# Altium PCB PCB1.PcbDoc
Units mm, origin at the board's own origin, x right, y up, seen from the top; angles counter-clockwise.
Board outline 152.4 x 101.6 mm, 4 copper layers (Top Layer, Int1 (GND), Int2 (PWR), Bottom Layer), stack 1.57 mm thick; 35 components, 28 nets, 158 pads, 29 vias.
Unrouted connection lines stored in the file: 38.
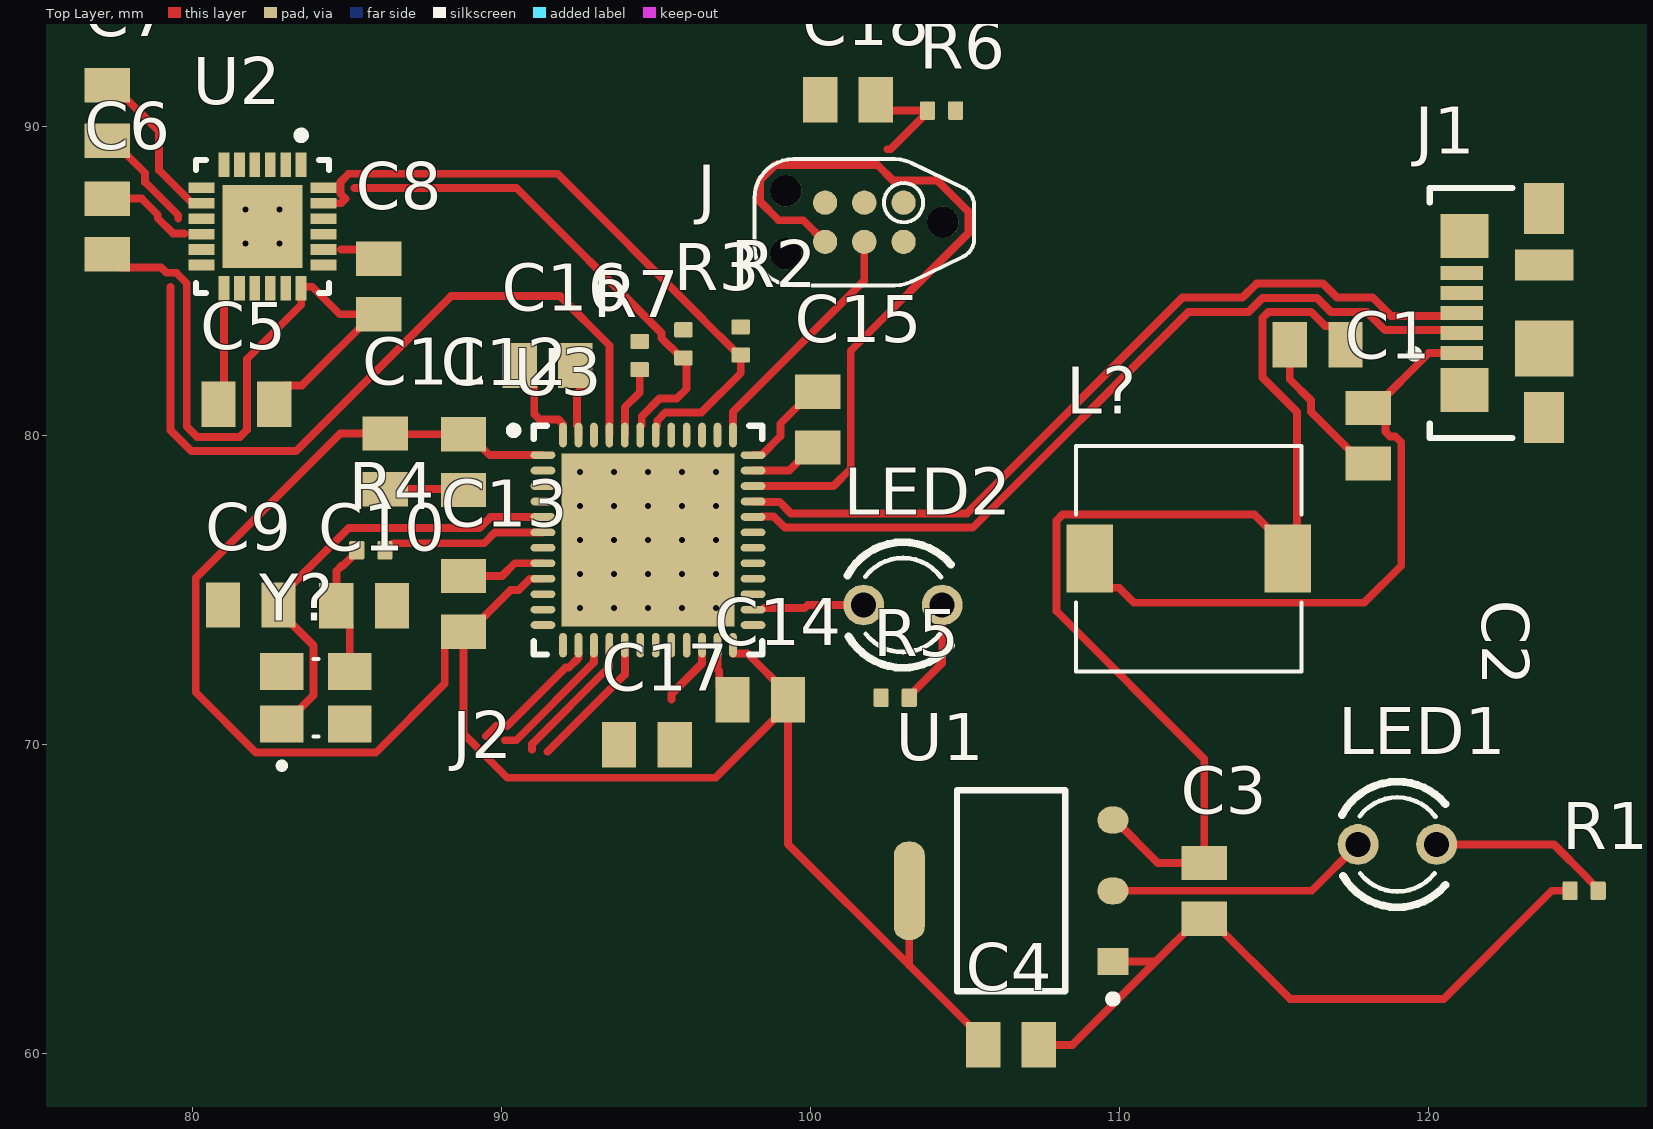
[diagram p0: Top Layer view]
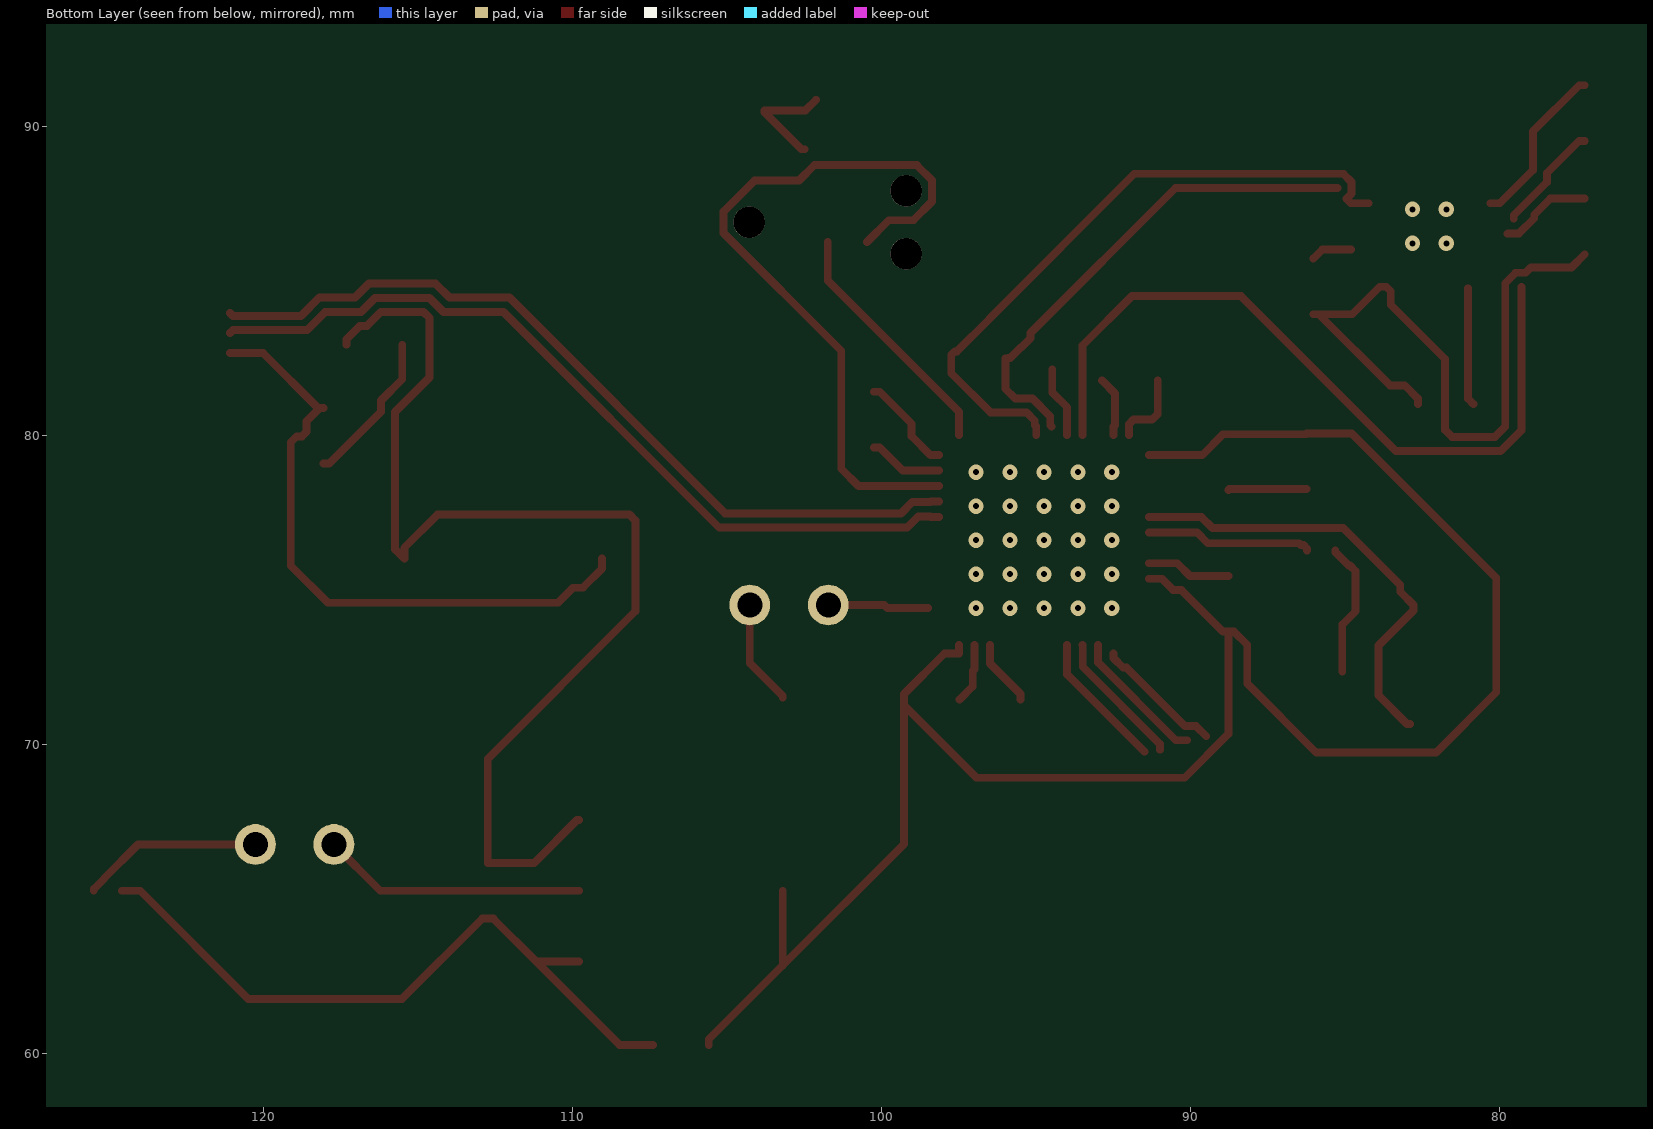
[diagram p1: Bottom Layer view, seen from below]
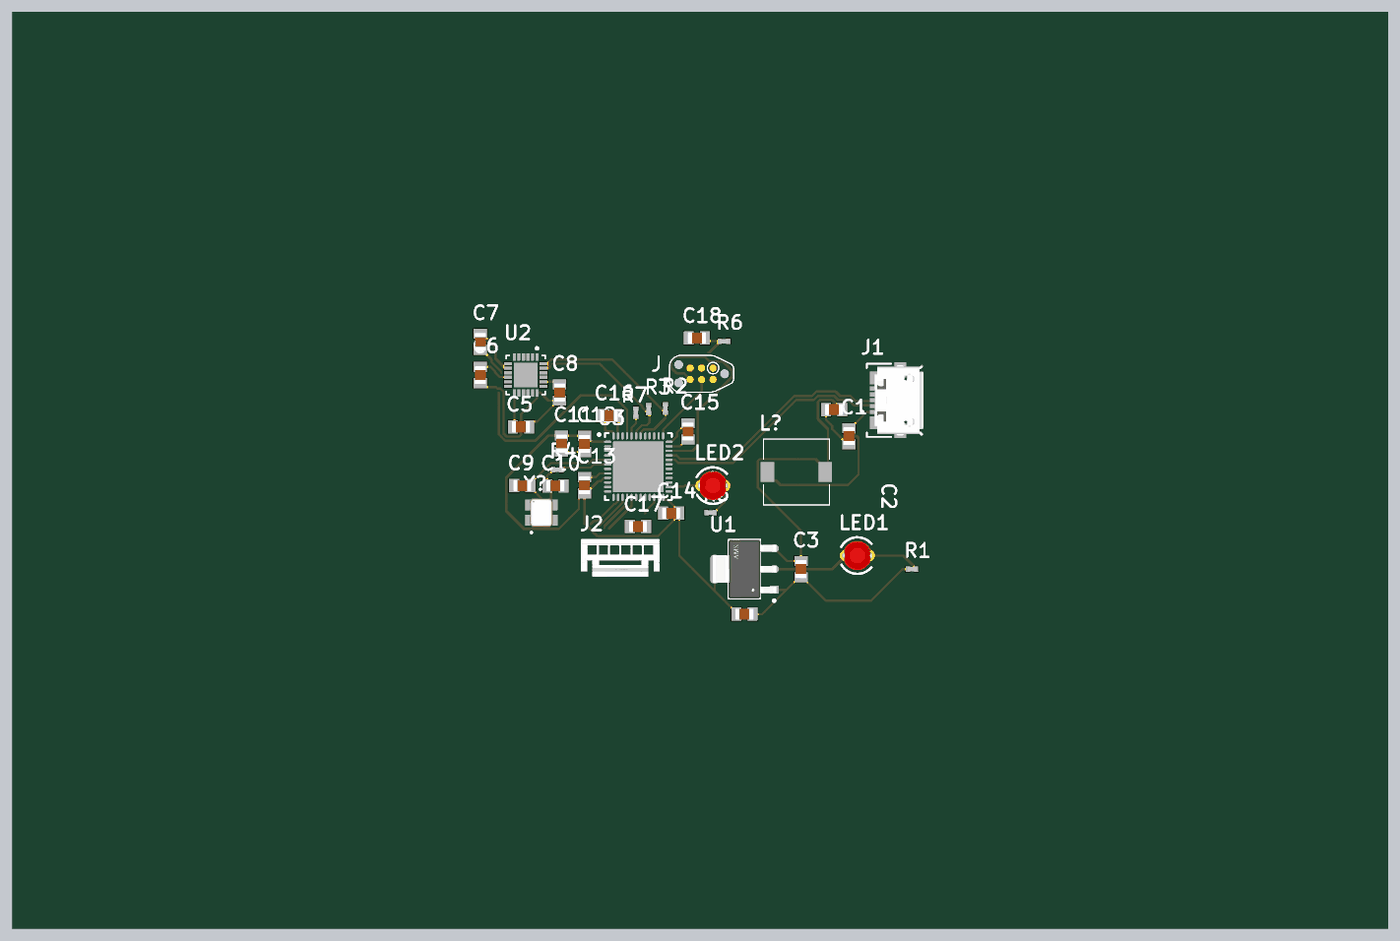
[diagram p2: 3D render of the assembled board from above, using the file's embedded part models]

## Layer stack, top to bottom
Top Solder: solder mask 0.0254, SM-001, Dk 4
Top Layer: signal copper 0.035
Dielectric 1: prepreg 0.2, PP-017, Dk 4.6
Int1 (GND): signal copper 0.0175
Dielectric 3: core 1.065, Core-039, Dk 4.6
Int2 (PWR): signal copper 0.0175
Dielectric 5: prepreg 0.2, PP-017, Dk 4.6
Bottom Layer: signal copper 0.035
Bottom Solder: solder mask 0.0254, SM-001, Dk 4

## Board outline
25.4,25.4 177.8,25.4 177.8,127 25.4,127

## Design rules (kind name [scope] priority, off if disabled: settings)
Clearance [All] p1: gap=0.2 ignorepadtopadclearanceinfootprint=FALSE
DiffPairsRouting [All] p1: maxlimit=0.254 minlimit=0.203 mostfreqgap=0.254 toplayer_maxgap=0.203 toplayer_prefgap=0.203 toplayer_minwidth=0.26 toplayer_maxwidth=0.26 toplayer_prefwidth=0.26 bottomlayer_maxgap=0.203 bottomlayer_prefgap=0.203 bottomlayer_minwidth=0.26 bottomlayer_maxwidth=0.26 bottomlayer_prefwidth=0.26 impedanceprofiledriven=TRUE impedanceprofileid={6F8DBCE6-1E18-4CB0-B7E9-831015EEBB44} impedanceprofilevalue=90.000000 maxuncoupledlength=12.7
PolygonConnect [All] p1: connectstyle=Direct reliefconductorwidth=0.254 reliefentries=4 polygonreliefangle="90 Angle" airgapwidth=0.254
RoutingVias [All] p1: holewidth=0.711 width=1.27 viastyle="Through Hole" minholewidth=0.711 minwidth=1.27 maxholewidth=0.711 maxwidth=1.27
SolderMaskExpansion [All] p1: expansion=0 istentingtop=FALSE
SupplyNets "Schematic Supply Nets_3" [InNet('VBUS')] p1: voltage=0.000
SupplyNets "Schematic Supply Nets_2" [InNet('+3V3')] p2: voltage=0.000
SupplyNets "Schematic Supply Nets_1" [InNet('GND')] p3: voltage=0.000
SupplyNets "Schematic Supply Nets" [InNet('+5')] p4: voltage=0.000
UnRoutedNet [All] p1: checkbadconnections=TRUE
Width [All] p1: maxlimit=1 minlimit=0.2 preferedwidth=0.254 midlayer1_minwidth=0.254 midlayer1_maxwidth=0.254 midlayer2_minwidth=0.254 midlayer2_maxwidth=0.254 minimp=50.000000 maximp=50.000000 favimp=50.000000
28 further rules are at their usual default settings.

## Classes and differential pairs
differential pair class *DIFF_USB: USB_D
differential pair USB_D: +USB_D_P -USB_D_N

## Components (designator, comment, footprint, x,y, rotation, side; value= is the part's Value field where it differs from the comment)
C1 "2u2" CAPC2012X145N 118.063,79.976 r90 top
C2 "2u2" CAPC2012X145N 116.42,82.921 r0 top
C3 "22u" CAPC2012X145N 112.75,65.25 r90 top
C4 "22u" CAPC2012X145N 106.5,60.263 r180 top
C5 "100n" CAPC2012X145N 81.75,81 r180 top
C6 "100n" CAPC2012X145N 77.25,86.75 r90 top
C7 "10n" CAPC2012X145N 77.25,90.42 r90 top
C8 "2u2" CAPC2012X145N 86.037,84.81 r90 top
C9 "10p" CAPC2012X145N 81.894,74.501 r0 top
C10 "10p" CAPC2012X145N 85.564,74.48 r180 top
C11 "2u2" CAPC2012X145N 86.25,79.15 r90 top
C12 "100n" CAPC2012X145N 88.778,79.124 r90 top
C13 "100n" CAPC2012X145N 88.778,74.539 r270 top
C14 "100n" CAPC2012X145N 98.383,71.438 r0 top
C15 "100n" CAPC2012X145N 100.25,80.5 r90 top
C16 "100n" CAPC2012X145N 91.5,82.25 r180 top
C17 "2u2" CAPC2012X145N 94.713,69.97 r0 top
C18 "100n" CAPC2012X145N 101.224,90.85 r0 top
J "TC2030-CTX" TC2030-IDC-NL 101.75,86.885 r180 top
J1 "473460001" FP-473460001-MFG 123.4,83.95 r90 top
J2 "GHR-06V-S" FP-GHR-06V-S-MFG 92.75,66.5 r180 top
L? "B82472P6472M000" IND_B82472P6472M000 112.25,76 r0 top
LED1 "TLLR4400" LED3MM 119,66.75 r0 top
LED2 "TLLR4400" LED3MM 103,74.5 r0 top
R1 "1K" RESC1005X35N 125.045,65.25 r0 top
R2 "2K2" RESC1005X35N 97.75,83.045 r90 top
R3 "2K2" RESC1005X35N 95.896,82.951 r90 top
R4 "0R" RESC1005X35N 85.779,76.267 r0 top
R5 "1K" RESC1005X35N 102.75,71.5 r180 top
R6 "10K" RESC1005X35N 104.25,90.5 r0 top
R7 "10K" RESC1005X35N 94.481,82.575 r270 top
U1 "AMS1117-3.3" FP-AMS1117-IPC_C 106.5,65.25 r180 top
U2 "MPU-6050" IS-QFN-24_V 82.275,86.75 r270 top
U3 "STM32F411CEU6" STM-UFQFPN48_L 94.75,76.6 r0 top
Y? "C3E-8.000-8-1015-R" XTAL_C3E-8.000-8-1015-R 84,71.5 r90 top

## Footprints (in the part's own frame and the unit in brackets; to place one, negate y for a bottom-side part, rotate by r counter-clockwise, add the part's x,y. Pads: shape width x height; smd on the part's side, far side on the other; paste and mask are expansions set on the pad)
CAPC2012X145N [mm]
  rect 1.11x1.47 smd paste+0 mask+0.102: 1(-0.9,0) 2(0.9,0)
  body extent -1,-0.63 1,0.63, height 1.45
FP-473460001-MFG [mm]
  rect 0.45x1.38 smd paste+0 mask+0: 1(-1.3,2.31) 2(-0.65,2.31) 3(0,2.31) 4(0.65,2.31) 5(1.3,2.31)
  rect 1.425x1.55 smd paste+0 mask+0: 6(-2.488,2.225) 7(2.488,2.225)
  rect 1.65x1.3 smd paste+0 mask+0: 8(-3.375,-0.35) 11(3.375,-0.35)
  rect 1.8x1.9 smd paste+0 mask+0: 9(-1.15,-0.35)
  rect 1x1.9 smd paste+0 mask+0: 10(1.55,-0.35)
  silkscreen extent -4.05,0.67 4.05,3.97, body extent -4.3,-2.48 4.3,3.45, height 0.25
FP-AMS1117-IPC_C [mm]
  rect 1.004x0.872 smd paste+0 mask+0: 1(-3.295,2.29)
  rrect100% 1.004x0.872 smd paste+0 mask+0: 2(-3.295,0) 3(-3.295,-2.29)
  rrect87% 1.004x3.182 smd paste+0 mask+0: 4(3.295,0)
  silkscreen extent -3.42,-3.25 1.75,3.62, body extent -3.9,-3.35 3.9,3.35, height 0.25
FP-GHR-06V-S-MFG [mm]
  body extent -4.47,-2.17 4.47,2.17, height 0.25
IND_B82472P6472M000 [mm]
  rect 1.5x2.2 smd: 1(-3.2,0) 2(3.2,0)
  silkscreen extent -3.65,-3.65 3.65,3.65
IS-QFN-24_V [mm] "QFN, 24-Leads, Body 4x4mm, Pitch 0.5mm, Thermal Pad 2.7x2.6mm"
  rect 0.8x0.35 smd: 1(-2,1.25) 2(-2,0.75) 3(-2,0.25) 4(-2,-0.25) 5(-2,-0.75) 6(-2,-1.25) 13(2,-1.25) 14(2,-0.75) 15(2,-0.25) 16(2,0.25) 17(2,0.75) 18(2,1.25)
  rect 0.35x0.85 smd mask+0.102: 7(-1.25,-1.975) 8(-0.75,-1.975) 9(-0.25,-1.975) 10(0.25,-1.975) 11(0.75,-1.975) 12(1.25,-1.975) 19(1.25,1.975) 20(0.75,1.975) 21(0.25,1.975) 22(-0.25,1.975) 23(-0.75,1.975) 24(-1.25,1.975)
  rect 2.7x2.6 smd: 25(0,0)
  silkscreen extent -3.07,-2.15 2.15,2.15, body extent -2,-2 2,2, height 0.95
LED3MM [mil]
  round 52 hole 32: A(-50,0) K(50,0)
  silkscreen extent -71,-80 61,80, body extent -60,-62 60,62, height 240
RESC1005X35N [mm]
  rrect20% 0.49x0.6 smd paste+0 mask+0.102: 1(-0.455,0) 2(0.455,0)
  body extent -0.5,-0.25 0.5,0.25, height 0.16
STM-UFQFPN48_L [mm] "QFN, 48-Leads, Body 7.1x7.1mm, Pitch 0.5mm, Thermal Pad 5.6x5.6mm, IPC High Density"
  oval 0.8x0.25 smd: 1(-3.4,2.75) 2(-3.4,2.25) 3(-3.4,1.75) 4(-3.4,1.25) 5(-3.4,0.75) 6(-3.4,0.25) 7(-3.4,-0.25) 8(-3.4,-0.75) 9(-3.4,-1.25) 10(-3.4,-1.75) 11(-3.4,-2.25) 12(-3.4,-2.75) 25(3.4,-2.75) 26(3.4,-2.25) 27(3.4,-1.75) 28(3.4,-1.25) 29(3.4,-0.75) 30(3.4,-0.25) 31(3.4,0.25) 32(3.4,0.75) 33(3.4,1.25) 34(3.4,1.75) 35(3.4,2.25) 36(3.4,2.75)
  oval 0.25x0.8 smd: 13(-2.75,-3.4) 14(-2.25,-3.4) 15(-1.75,-3.4) 16(-1.25,-3.4) 17(-0.75,-3.4) 18(-0.25,-3.4) 19(0.25,-3.4) 20(0.75,-3.4) 21(1.25,-3.4) 22(1.75,-3.4) 23(2.25,-3.4) 24(2.75,-3.4) 37(2.75,3.4) 38(2.25,3.4) 39(1.75,3.4) 40(1.25,3.4) 41(0.75,3.4) 42(0.25,3.4) 43(-0.25,3.4) 44(-0.75,3.4) 45(-1.25,3.4) 46(-1.75,3.4) 47(-2.25,3.4) 48(-2.75,3.4)
  rect 5.6x5.6 smd: 49(0,0)
  silkscreen extent -4.47,-3.7 3.7,3.7, body extent -3.55,-3.55 3.55,3.55, height 0.6
TC2030-IDC-NL [mil]
  round 31 smd paste-39.37: 1(-50,-25) 2(-50,25) 3(0,-25) 4(0,25) 5(50,-25) 6(50,25)
  round 40 hole 40 unplated: ""(-100,0) ""(100,-40) ""(100,40)
  silkscreen extent -140,-81 140,81
XTAL_C3E-8.000-8-1015-R [mm]
  rect 1.2x1.4 smd: 1(-0.85,1.1) 2(-0.85,-1.1) 3(0.85,-1.1) 4(0.85,1.1)
  silkscreen extent -2.3,-0.08 1.25,1.2, body extent -1.25,-1.6 1.25,1.6, height 0.75

## Part data
C1 C2 C3 C4 C5 C6 C7 C8 C9 C10 C11 C12 C13 C14 C15 C16 C17 C18: library part GRM21BC81E106KE11L, "10 ÂµF Â±10% 25V Ceramic Capacitor X6S 0805 (2012 Metric)", Package="2012 Murata", Check_prices=https://www.snapeda.com/parts/GRM21BC81E106KE11L/Murata/view-part/?ref=eda, MF=Murata, MP=GRM21BC81E106KE11L, SnapEDA_Link=https://www.snapeda.com/parts/GRM21BC81E106KE11L/Murata/view-part/?ref=snap
J: "CortexÂ® Plug-Of-Nailsâ„¢ Adapter Cable", Package=None, Availability=Unavailable, MF="Tag-Connect LLC", MP=TC2030-CTX, Price=None, SnapEDA_Link=https://www.snapeda.com/parts/TC2030-CTX/Tag-Connect%20LLC/view-part/225831/?ref=snap
J1: library part CMP-2000-05246-2, "CONN RCPT USB2.0 MICRO B SMD R/A", Current Rating=1.8A, Manufacturer=Molex, Package=0, Temperature="-30°C to +85°C", Temperature Range High=+85°C, Temperature Range Low=-30°C, Voltage Rating=30V, Automotive=No, Category=Conn, ComponentLink2Description=Datasheet, ComponentLink2URL=https://www.molex.com/webdocs/datasheets/pdf/en-us/0473460001_IO_CONNECTORS.pdf, Conn Orientation="Right Angle", Contact Material=Gold,Nickel, Device Class L1=Connectors, Device Class L2="USB Connectors", Device Class L3=unset, Digikey Description="CONN RCPT USB2.0 MICRO B SMD R/A", Footprint Url=https://www.molex.com/pdm_docs/sd/473460001_sd.pdf, Height=2.945mm, Is Female=yes, Lead Free=Yes, Manufacturer Part Number=473460001, Number Of Contacts=5, Octopart=https://octopart.com/47346-0001-molex-7164928, Pitch=0.65mm, RoHS=TRUE, Shielding=true, Usb Standard="USB 2.0"
J2: library part CMP-17439-000079-1, "CONN GH HOUSING 6POS 1.25MM", Color=Natural, Current Rating=1A, Max Operating Temperature=85°C, Min Operating Temperature=-25°C, Voltage Rating (AC)=50V, Connector Type=Receptacle, Contact Material=Bronze, Contact Plating=Tin, Contact Type="Female Socket", Depth=5.7mm, Fastening Type=Latch, Housing Color=Natural, Housing Material=PBT, Lead Free="Lead Free", Length=8.75mm, Mount="Free Hanging", Number Of Contacts=6, Number of Positions=6, Number of Rows=1, Packaging=Bulk, Pitch=0.049inch, REACH SVHC="No SVHC", Series=GH, Termination=Crimp, Width=4.15mm, Wire/Cable Gauge=26AWG
L? Y?: Package=None, Price=None
  L?: Availability="In Stock", Check_prices=https://www.snapeda.com/parts/B82472P6472M000/TDK/view-part/?ref=eda, MF=TDK, MP=B82472P6472M000, Purchase-URL=https://pricing.snapeda.com/search/part/B82472P6472M000/?ref=eda, SnapEDA_Link=https://www.snapeda.com/parts/B82472P6472M000/TDK/view-part/?ref=snap
  Y?: Availability=Unavailable, MP=C3E-8.000-8-1015-R
LED1 LED2: "Red 619nm LED Indication - Discrete 1.9V Radial", Package=None, Check_prices=https://www.snapeda.com/parts/TLLR4400/Vishay+Semiconductor+Opto+Division/view-part/?ref=eda, MF=Vishay, MP=TLLR4400, SnapEDA_Link=https://www.snapeda.com/parts/TLLR4400/Vishay+Semiconductor+Opto+Division/view-part/?ref=snap
R1 R2 R3 R4 R5 R6 R7: library part 1-2176049-2, "Fixed Resistor, Thick Film, 0.12", Package=0402, Power_Rating=".125 W", Resistance=.15, Tolerance=1%, Check_prices=https://www.snapeda.com/parts/1-2176049-2/TE+Connectivity/view-part/?ref=eda, EU_RoHS_Compliance="Compliant with Exemptions", MF="TE Connectivity", MP=1-2176049-2, SnapEDA_Link=https://www.snapeda.com/parts/1-2176049-2/TE+Connectivity/view-part/?ref=snap
U1: library part CMP-209535-000001-1, "LDO Voltage Regulators 1A, 3.3V", Dropout Voltage=1.1V, Manufacturer="Advanced Monolithic Systems", Max Junction Temp=+125°C, Max Power Dissipation=1.2W, Max Supply Voltage=15V, Nominal Supply Current=5mA, Output Current=1A, Output Voltage=3.3V, Package=AMS1117, Temperature="-40°C to +125°C", Temperature Range Low=-40°C, Automotive=No, Category=IC, ComponentLink2Description=Datasheet, ComponentLink2URL=http://www.advanced-monolithic.com/pdf/ds1117.pdf, Device Class L1="Integrated Circuits (ICs)", Device Class L2="Power Management ICs", Device Class L3="Voltage Regulators - Linear", Height=1.8mm, Ipc Land Pattern Name=SOT229P700X180-4, Lead Free=Yes, Manufacturer Part Number=AMS1117-3.3, Number Of Outputs=1, Octopart=https://octopart.com/ams1117-3.3-advanced+monolithic+systems-25899300, Output Type=Fixed, RoHS=TRUE, Standoff Height=0.64mm, Temperature Range High=+125°C
U2: library part CMP-1753-00002-2, "3-Axis Gyroscope, Accelerometer and a Digital Motion Processor(TM) (DMP), 2.375 to 3.46 V, -40 to 85 degC, 24-Pin QFN, RoHS, Tape and Reel", Manufacturer=InvenSense, Standard Package=5,000, Category=Sensors,Transducers, Datasheet URL=http://datasheet.octopart.com/MPU-6050-InvenSense-datasheet-14421344.pdf, Datasheet Version="Rev. 3.3, 05/2012", Dynamic Catalog=MPU-6000™Series, Family=Multifunction, Featured Product=MPU-60506-Axis,IntegratedI²CSolution, Manufacturer URL=http://www.invensense.com/, Online Catalog=MPU-6000™Series, Other Names="1428-1007-2 / MPU6050", Output Type=Digital, Sensor Type=MotionTracking, Unit PriceUSD=Digital
U3: library part CMP-0243-00165-1, "ARM Cortex-M4 32-bit MCU+FPU, 512 KB Flash, 128 KB RAM, 36 I/Os, 48-Pin UFQFPN, -40 to 85 degC, Tray", I/Os (High Current)=36, Operating Frequency(F) (Processor speed) (MHz)=100, Package Description=UFQFPN48, Package Reference="48-Pin Ultra Thin Fine Pitch Quad Flat No-Lead, 7 x 7 x 0.6 mm Body, 0.5 mm Pitch, Exposed Pad", Supply Voltage(Vcc) min (V)=1.7, ComponentLink1Description="Manufacturer URL", ComponentLink1URL=http://www.st.com/, ComponentLink2Description=Datasheet, ComponentLink2URL=http://www.st.com/st-web-ui/static/active/en/resource/technical/document/datasheet/DM00115249.pdf, Core="ARM Cortex-M4", DatasheetVersion="Rev. 6", FLASH Size (Prog) (kB)=512, Internal RAM Size (kB)=128, Mounting Technology="Surface Mount", Packing=Tray

## Via types
v1: diameter 0.5, hole 0.2, Top Layer to Bottom Layer, 29 vias

## Nets (pads, with @x,y where several pads share a name; then routed paths per layer and width w, separated by ;. In a path a pad name is that pad's centre, name@x,y a point inside that pad or via, vN(x,y) a via of type N, cw(c..) or ccw(c..) an arc to the next point about the centre after c; other vN are vias at no path point)
+3V3: C4.2 C5.2 C7.2 C11.2 C12.2 C13.2 C14.2 C15.2 C16.2 J.1 J.5 LED1.A R2.2 R3.2 R6.2 U1.2 U1.4 U2.1 U2.8 U2.9 U2.11 U2.13 U3.1 U3.9 U3.24 U3.36 U3.48 | length 90.1
  Top Layer w0.254: C7.2 77.43,91.32 78.929,89.821 78.929,88.571 80,87.5 U2.8 ; C5.2 81.025,81.175 U2.13 ; C16.2@91.069,81.762 91.069,80.681 91.25,80.5 91.851,80.5 92,80.351 U3.48 ; U3.9 91.348,75.348 90.934,75.348 90.571,74.985 90.304,74.985 88.958,73.639 C13.2 ; U3.1 89.632,79.35 88.958,80.024 C12.2 86.276,80.024 C11.2 84.791,80.05 80.112,75.371 80.112,71.675 82.065,69.723 85.935,69.723 88.17,71.958 88.17,73.211 88.598,73.639 C13.2 ; U3.24 97.5,72.929 97.502,72.927 97.974,72.927 99.283,71.618 C14.2 C14.2@99.283,71.258 ; U3.36 98.421,79.35 99.033,79.961 99.033,80.363 100.07,81.4 C15.2 ; U1.4 103.205,62.838 ; C4.2 105.6,60.443 103.205,62.838 ; U1.2 116.23,65.25 LED1.A ; C13.2 88.778,70.33 90.199,68.908 96.934,68.908 C14.2@99.283,71.258 ; C14.2@99.283,71.258 99.283,66.76 103.205,62.838
+5: C2.2 C3.2 L?.2 U1.3 | length 36.6
  Top Layer w0.254: U1.3 109.861,67.54 111.251,66.15 C3.2 112.75,69.518 107.973,74.295 107.973,77.235 108.165,77.427 114.373,77.427 115.45,76.35 L?.2 115.75,76.3 115.75,80.747 114.638,81.86 114.638,83.792 114.829,83.983 116.21,83.983 116.664,83.529 116.892,83.529 117.32,83.101 C2.2
GND: C1.1 C2.1 C3.1 C4.1 C5.1 C6.1 C7.1 C8.1 C9.1 C10.1 C11.1 C12.1 C13.1 C14.1 C15.1 C16.1 C17.1 C18.1 J1.5 R1.1 R5.2 R7.1 U1.1 U2.18 U2.25 U3.8 U3.23 U3.35 U3.47 U3.49 Y?.2 Y?.4 | length 65.6
  Top Layer w0.254: C6.1 77.678,85.422 78.994,85.422 79.166,85.25 79.488,85.25 79.824,84.914 79.824,80.274 80.16,79.938 81.54,79.938 81.768,80.166 81.768,82.456 83.527,84.215 83.527,84.653 83.676,84.801 83.886,84.801 84.778,83.91 C8.1 85.857,83.91 83.555,81.608 83.078,81.608 82.65,81.18 C5.1 ; C7.1 77.43,89.52 78.475,88.475 78.475,88.183 79.548,87.11 79.548,87 ; C11.1 88.752,78.25 C12.1 ; C13.1 90.027,75.439 90.438,75.85 U3.8 ; U3.47 92.5,80.271 92.454,80.317 92.454,81.347 C16.1@92.869,81.762 ; U3.23 97.002,73.198 97.002,72.419 97.055,72.366 97.055,71.866 C14.1 ; U3.35 99.32,78.85 100.07,79.6 C15.1 ; C4.1 108.483,60.263 111.18,62.96 ; U1.1 111.18,62.96 ; C2.1 115.52,81.805 116.204,81.121 116.204,80.755 117.883,79.076 C1.1 ; R1.1 124,65.25 120.5,61.75 115.53,61.75 112.93,64.35 C3.1 112.57,64.35 111.18,62.96
  other v1: 92.55,74.4 93.65,74.4 94.75,74.4 95.85,74.4 96.95,74.4 92.55,75.5 93.65,75.5 94.75,75.5 95.85,75.5 96.95,75.5 92.55,76.6 93.65,76.6 94.75,76.6 95.85,76.6 96.95,76.6 92.55,77.7 93.65,77.7 94.75,77.7 95.85,77.7 96.95,77.7 92.55,78.8 93.65,78.8 94.75,78.8 95.85,78.8 96.95,78.8 81.725,86.2 82.825,86.2 81.725,87.3 82.825,87.3
IMU_CPOUT: C8.2 U2.20 | length 1.3
  Top Layer w0.254: 84.812,86 85.747,86 C8.2
IMU_INT: U2.12 U3.45 | length 24.8
  Top Layer w0.254: 79.3,84.796 79.3,80.156 79.972,79.484 83.364,79.484 88.38,84.5 91.902,84.5 93.5,82.902 U3.45
IMU_REGOUT: C6.2 U2.10 | length 3
  Top Layer w0.254: C6.2 78.366,87.65 78.886,87.13 78.886,87.02 79.379,86.527 79.736,86.527 79.75,86.513
IMU_SCL: R2.1 U2.23 U3.42 | length 21.2
  Top Layer w0.254: U2.23 84.812,87.5 84.96,87.648 84.796,87.812 84.796,88.188 85.062,88.454 91.827,88.454 96.523,83.758 96.523,83.748 97.563,82.708 97.632,82.708 R2.1 ; U3.42 95,80.271 95.048,80.319 95.048,80.462 95.313,80.727 96.477,80.727 97.75,82 R2.1@97.75,82.545
IMU_SDA: R3.1 U2.24 U3.43 | length 16.2
  Top Layer w0.254: 85.25,88 90.49,88 95.188,83.301 95.188,83.135 95.489,82.834 95.503,82.834 95.841,82.496 R3.1 ; U3.43@94.502,80.273 94.546,80.317 94.546,80.602 95.125,81.181 95.681,81.181 96,81.5 R3.1@96,82.486
LED_PWR_K: LED1.K R1.2 | length 5.9
  Top Layer w0.254: LED1.K 124.069,66.75 125.162,65.657 125.162,65.643 125.5,65.305 R1.2
MCU_BOOT0: R7.2 U3.44 | length 2.3
  Top Layer w0.254: U3.44 94,80.896 94.481,81.377 R7.2
MCU_OSC_IN: C9.2 U3.5 Y?.1 | length 14.7
  Top Layer w0.254: Y?.1 83,70.65 83.927,71.577 83.927,73.188 82.794,74.321 C9.2 83.222,74.929 83.222,75.145 85.067,76.989 89.295,76.989 89.656,77.35 U3.5
MCU_OSC_OUT: R4.2 U3.6 | length 5.4
  Top Layer w0.254: R4.2 86.234,76.322 86.352,76.44 86.441,76.44 86.501,76.5 89.448,76.5 89.798,76.85 U3.6
MCU_PA4: U3.14 | length 4.2
  Top Layer w0.254: 89.5,70.25 89.829,70.579 90.187,70.579 92.081,72.473 92.187,72.473 92.498,72.784 U3.14@92.498,72.927
MCU_PA5: U3.15 | length 4.5
  Top Layer w0.254: 90.125,70.125 90.481,70.125 92.998,72.642 92.998,73.198 U3.15
MCU_PA6: U3.16 | length 4.4
  Top Layer w0.254: 91,69.814 91,70.002 93.498,72.5 93.498,73.198 U3.16
MCU_PA7: U3.17 | length 4.5
  Top Layer w0.254: 91.5,69.75 94,72.25 U3.17
MCU_RST: J.3
MCU_SWCLK: J.4 U3.37 | length 8
  Top Layer w0.254: U3.37 97.5,80.75 101.75,85 J.4
MCU_SWDIO: J.6 U3.34 | length 24.2
  Top Layer w0.254: U3.34 100.752,78.35 101.312,78.91 101.312,82.726 105.125,86.539 105.125,87.231 104.115,88.241 102.676,88.241 102.181,88.736 98.864,88.736 98.375,88.247 98.375,87.555 98.977,86.954 99.776,86.954 J.6
MCU_SWO: J.2 U3.39
MCU_VCAP1: C17.2 U3.22 | length 2.2
  Top Layer w0.254: 95.51,71.438 95.51,71.618 96.498,72.606 96.498,73.198 U3.22
NetC18_2: C18.2 R6.1 U3.7 | length 3.7
  Top Layer w0.254: C18.2 102.474,90.5 R6.1 103.795,90.445 102.6,89.25 102.5,89.25
NetLED2_A: LED2.A U3.26 | length 3.3
  Top Layer w0.254: U3.26@98.5,74.398 99.818,74.398 99.92,74.5 LED2.A
NetLED2_K: LED2.K R5.1 | length 3.4
  Top Layer w0.254: R5.1 103.205,71.555 104.27,72.62 LED2.K
USB_D_N: J1.2 U3.32 | length 26.7
  Top Layer w0.26: U3.32 98.415,77.35 98.433,77.368 98.82,77.368 99.186,77.002 105.259,77.002 112.243,83.986 114.186,83.986 114.64,84.44 116.399,84.44 116.853,83.986 118.011,83.986 118.604,83.393 120.997,83.393 J1.2
USB_D_P: J1.3 U3.33 | length 26.7
  Top Layer w0.26: U3.33 98.415,77.85 98.433,77.832 99.012,77.832 99.378,77.465 105.067,77.465 112.051,84.45 113.994,84.45 114.448,84.904 116.591,84.904 117.045,84.45 118.203,84.45 118.796,83.857 120.997,83.857 J1.3
VBUS: C1.2 J1.1 L?.1 | length 20.8
  Top Layer w0.254: L?.1 109.05,75.683 109.673,75.06 109.99,75.06 110.477,74.573 117.924,74.573 119.125,75.774 119.125,79.767 118.933,79.958 118.763,79.958 118.615,80.107 118.615,80.448 118.187,80.876 C1.2 118.243,80.876 120.017,82.65 J1.1
XTAL_IN: C10.2 R4.1 Y?.3 | length 4.4
  Top Layer w0.254: Y?.3 85.1,73.865 84.664,74.3 C10.2 84.664,75.596 84.844,75.776 84.888,75.776 85.324,76.212 R4.1
pads on no net: J1.4 J1.6 J1.7 J1.8 J1.9 J1.10 J1.11 J. U2.2 U2.3 U2.4 U2.5 U2.6 U2.7 U2.14 U2.15 U2.16 U2.17 U2.19 U2.21 U2.22 U3.2 U3.3 U3.4 U3.10 U3.11 U3.12 U3.13 U3.18 U3.19 U3.20 U3.21 U3.25 U3.27 U3.28 U3.29 U3.30 U3.31 U3.38 U3.40 U3.41 U3.46